# EAGLE board Main_board_revB (EAGLE 7.0.0)
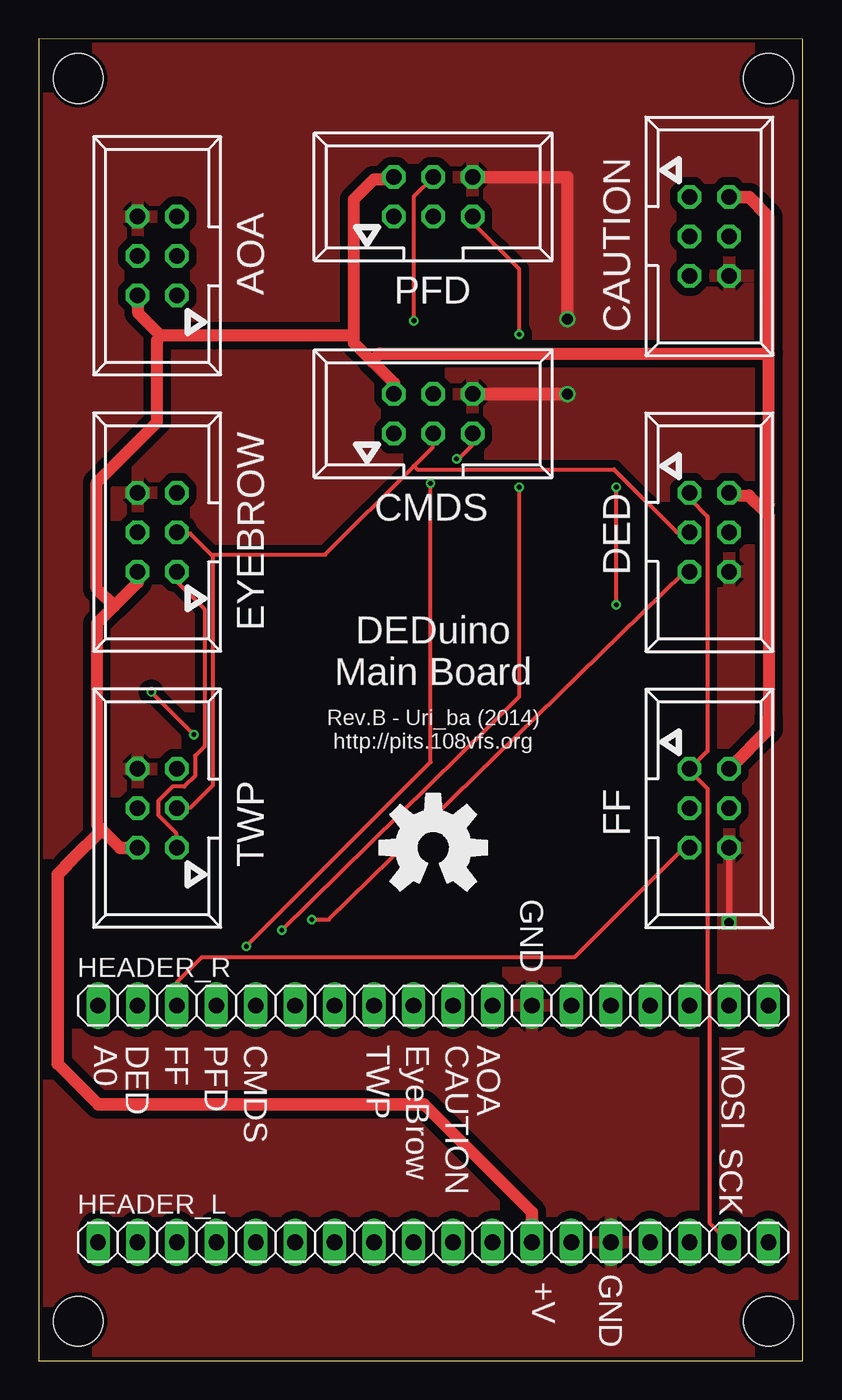
[diagram p0: board, top side]
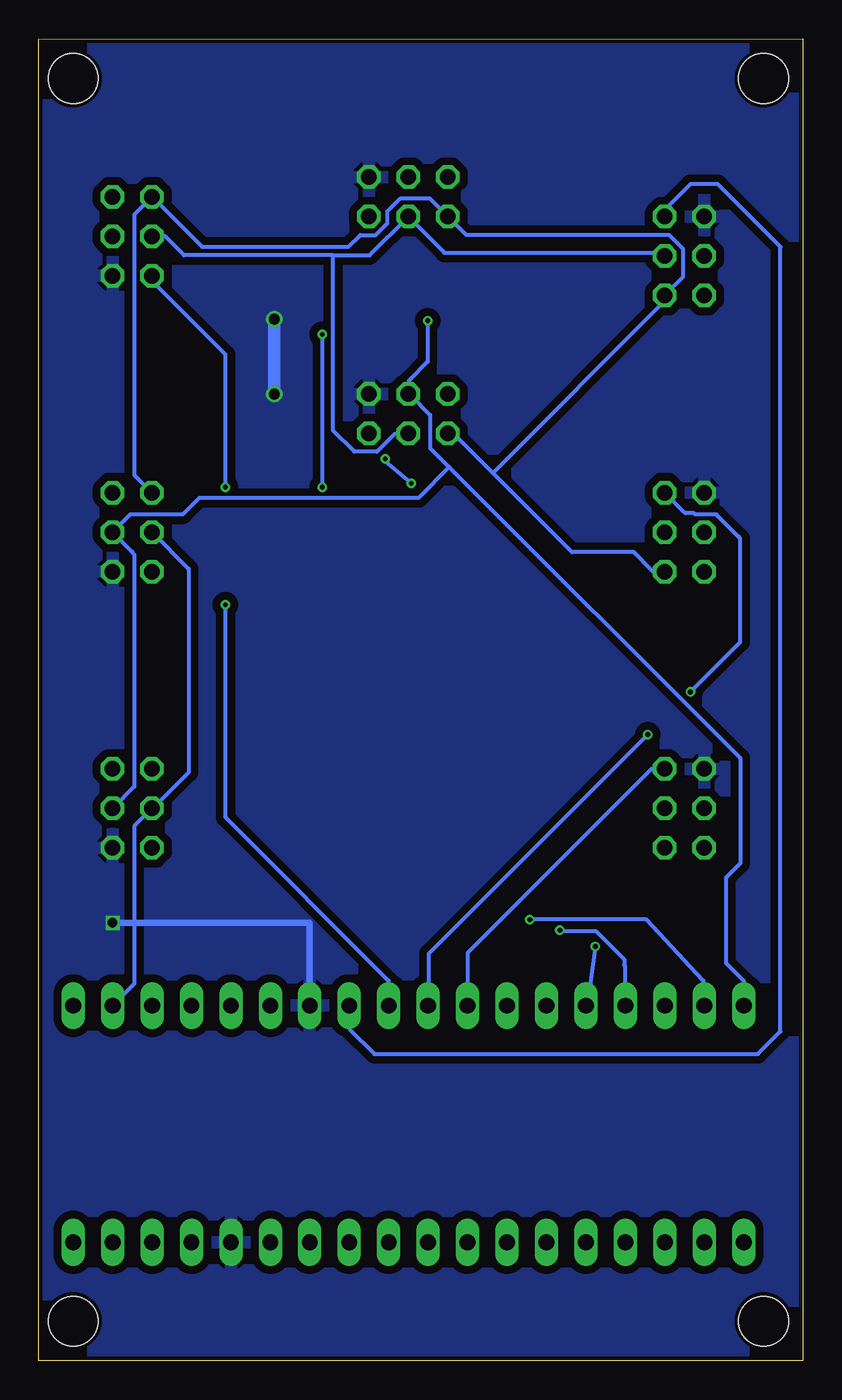
[diagram p1: board, bottom side, seen from below]

Size 49.2 x 85.1 mm. Coordinates in mm from the lower left corner, seen from the top.
Outline: 0,0 49.2,0 49.2,85.08 0,85.1 0,0
Copper layers (1*16): Top 0.035mm / dielectric 1.5mm / Bottom 0.035mm
Design rules "ITEADstudio_DRC": minimum track width 6mil, minimum drill 12mil, track to track 6mil, track to pad 6mil, pad to pad 6mil, via to via 6mil, smd to smd 0mil, copper to edge 10mil, drill to drill 10mil, minimum pad ring 10mil, minimum via ring 6mil, stop-mask expansion 2mil, vias tented up to drill 100mil, thermal gap 10mil
Net classes: 1 Power: width 0.762 mm, drill 0.508 mm, clearance 0.508 mm; 2 Normal: width 0.254 mm, drill 0.203 mm, clearance 0.254 mm
Holes 3.2 mm at 2.54,82.55 46.99,82.55 46.99,2.54 2.54,2.54

## Footprints (pad centres in the part's own frame; a part is rotated, then mirrored left to right if it is on the bottom)
057-006-1 = drill 1 octagon: 1 -2.54,-1.27; 2 -2.54,1.27; 3 0,-1.27; 4 0,1.27; 5 2.54,-1.27; 6 2.54,1.27
1X18 = drill 1.016 long: 1 -21.59,0; 2 -19.05,0; 3 -16.51,0; 4 -13.97,0; 5 -11.43,0; 6 -8.89,0; 7 -6.35,0; 8 -3.81,0; 9 -1.27,0; 10 1.27,0; 11 3.81,0; 12 6.35,0; 13 8.89,0; 14 11.43,0; 15 13.97,0; 16 16.51,0; 17 19.05,0; 18 21.59,0

## Placement (x,y rotation side)
AOA  057-006-1  [057-006-1]  7.62,71.12 90 top
CAUTION  057-006-1  [057-006-1]  43.18,72.39 270 top
CMDS  057-006-1  [057-006-1]  25.4,60.96 0 top
DED  057-006-1  [057-006-1]  43.18,53.34 270 top
EYEBROW  057-006-1  [057-006-1]  7.62,53.34 90 top
FF  057-006-1  [057-006-1]  43.18,35.56 270 top
HEADER_L  [1X18]  25.4,7.62 0 top
HEADER_R  [1X18]  25.4,22.86 0 top
LOGO1  OSHW-LOGOL  [OSHW-LOGO-L]  25.4,33.02 0 top
PFD  057-006-1  [057-006-1]  25.4,74.93 0 top
TWP  057-006-1  [057-006-1]  7.62,35.56 90 top

## Library data of the parts
AOA CAUTION CMDS DED EYEBROW FF PFD TWP = con-panduit; OC_FARNELL: unknown; OC_NEWARK: unknown
HEADER_L HEADER_R = pinhead
LOGO1 = SparkFun-Aesthetics

## Nets
+5V [Power]: AOA.2 CAUTION.2 CMDS.2 DED.2 EYEBROW.2 FF.2 HEADER_L.12 PFD.2 TWP.2
AOA_LATCH [Normal]: AOA.5 HEADER_R.11
CAUTION_LATCH [Normal]: CAUTION.5 HEADER_R.10
CMDS_SEL [Normal]: CMDS.5 HEADER_R.5
DED_SEL [Normal]: DED.5 HEADER_R.2
DISP_A0 [Normal]: CMDS.4 DED.4 FF.4 HEADER_R.1 PFD.4
EYEBROW_LATCH [Normal]: EYEBROW.5 HEADER_R.9
FF_SEL [Normal]: FF.5 HEADER_R.3
GND [Power]: AOA.6 CAUTION.6 CMDS.6 DED.6 EYEBROW.6 FF.6 HEADER_L.14 HEADER_R.12 PFD.6 TWP.6
MOSI [Normal]: AOA.3 CAUTION.3 CMDS.3 DED.3 EYEBROW.3 FF.3 HEADER_R.17 PFD.3 TWP.3
PFD_SEL [Normal]: HEADER_R.4 PFD.5
SCK [Normal]: AOA.1 CAUTION.1 CMDS.1 DED.1 EYEBROW.1 FF.1 HEADER_L.17 PFD.1 TWP.1
TWP_LATCH [Normal]: HEADER_R.8 TWP.5

## Tracks (layer width: path | path; a pad name or v marks a point on that pad's centre or on a via)
+5V
  Top 0.762: 47.02,41.38 47.02,54.41 46.67,54.75 | 46.67,54.75 45.72,55.7 45.03,55.7 44.88,55.85 44.5,55.85 DED.2 | 44.5,74.91 CAUTION.2 | 46.67,54.75 47.02,55.09 47.02,64.85 21.95,64.85 21.45,64.35 20.27,65.53 20.27,65.99 | 20.27,65.99 20.27,74.75 21.57,76.05 22.25,76.05 22.48,76.28 22.78,76.28 PFD.2 | 7.85,65.99 6.4,67.44 6.4,68.58 AOA.2 | 20.27,65.99 7.85,65.99 | 1.6,31.7 2.1,32.19 4.08,34.18 3.73,34.52 3.73,47.47 4.84,48.58 3.73,49.68 3.73,56.54 7.62,60.43 7.62,65.68 7.85,65.99
  Top 0.813: 2.1,32.19 1.22,31.32 1.22,19.1 3.81,16.51 24.79,16.51 31.75,9.55 HEADER_L.12 | 44.5,74.91 45.74,74.91 46.99,73.66 46.99,64.87 47.02,64.85 | 47.02,41.38 47.02,40.66 FF.2 | 4.84,48.58 6.35,50.09 EYEBROW.2 | 21.45,64.35 22.86,62.94 CMDS.2 | 4.08,34.18 5.23,33.02 TWP.2
AOA_LATCH
  Bottom 0.254: AOA.5 8.84,73.69 8.84,74.14 7.24,75.74 5.49,75.74 1.45,71.7 1.45,21.18 2.9,19.74 27.58,19.74 29.18,21.34 29.18,22.86 HEADER_R.11
CAUTION_LATCH  (via drill 0.3)
  Top 0.254: v37.19,48.67 v37.19,56.24
  Bottom 0.254: CAUTION.5 41.91,69.49 37.19,64.77 v37.19,56.24 | v37.19,48.67 37.19,34.98 26.67,24.46 HEADER_R.10
CMDS_SEL  (via drill 0.3)
  Top 0.254: v26.9,58.06 27.05,58.06 27.89,58.9 27.89,59.66 CMDS.5 | v25.22,56.49 25.22,38.53 v13.36,26.67
  Bottom 0.254: v26.9,58.06 26.9,57.91 v25.22,56.49 | 13.95,22.86 HEADER_R.5 13.87,22.96 v13.36,26.67
DED_SEL  (via drill 0.3)
  Top 0.254: v17.58,28.4 18.67,28.4 41.53,50.75 41.91,50.75 DED.5
  Bottom 0.254: v17.58,28.4 10.08,28.4 6.4,24.46 6.4,22.86 HEADER_R.2
DISP_A0  (via drill 0.3)
  Top 0.254: v24.16,66.95 24.16,74.95 PFD.4
  Bottom 0.254: v24.16,66.95 24.16,64.31 25.38,63.09 25.38,62.26 CMDS.4 25.3,62.18 24,60.88 24,58.75 22.78,57.53 | HEADER_R.1 3.81,24.46 4.95,25.6 4.95,31.09 4.04,32 4.04,38.79 22.78,57.53 | 22.78,57.53 24.77,55.55 38.86,55.55 39.93,54.48 43.31,54.48 DED.4 43.18,52.07 43.13,51.97 43.05,51.89 43.05,36.96 FF.4
EYEBROW_LATCH  (via drill 0.3)
  Top 0.254: v9.98,40.31 v7.24,43.05
  Bottom 0.254: v7.24,43.05 4.04,46.25 4.04,52.93 4.12,53.03 5.56,54.48 6.93,54.48 7.01,54.56 7.54,54.56 7.62,54.61 EYEBROW.5 | v9.98,40.31 24.08,26.21 24.08,22.86 HEADER_R.9
FF_SEL
  Top 0.254: FF.5 41.91,32.99 41.53,32.99 34.52,25.98 10.52,25.98 8.89,24.36 HEADER_R.3 8.91,22.86
GND  (via drill 0.6, 0.7)
  Top 0.406: FF.6 v44.45,28.19
  Top 0.813: PFD.6 34.04,76.2 v34.04,67.06 | CMDS.6 v34.04,62.23
  Bottom 0.406: v44.45,28.19 31.75,28.19 HEADER_R.12
  Bottom 0.813: v34.04,67.06 v34.04,62.23
  pour Bottom: -0.51,85.6 49.53,85.6 49.53,-0.13 -0.25,-0.25
  pour Top: -0.89,85.98 49.66,86.23 50.16,-0.89 -0.76,-0.76
MOSI
  Top 0.254: 11.2,51.82 11.2,37.03 9.75,35.59 8.91,35.59 TWP.3 | 11.2,51.82 9.75,53.26 8.99,53.26 8.91,53.34 EYEBROW.3 | 24.16,57.61 18.44,51.89 11.28,51.89 11.2,51.82 | 24.16,57.61 25.38,58.83 25.38,59.66 CMDS.3 | DED.3 41.07,53.34 37.03,57.38 24.38,57.38 24.16,57.61
  Bottom 0.254: CAUTION.3 41.07,72.39 39.85,71.17 30.25,71.17 | 44.42,22.86 HEADER_R.17 43.05,24.26 43.05,34.42 FF.3 41.83,35.59 39.55,37.87 39.55,50.98 DED.3 | 30.25,71.17 30.25,59.89 28.88,58.52 27.43,58.52 26.29,59.66 25.45,59.66 CMDS.3 | AOA.3 9.09,71.32 23.09,71.32 25.38,73.61 PFD.3 27.89,71.17 30.25,71.17
PFD_SEL  (via drill 0.3)
  Top 0.254: v30.94,66.06 30.94,70.26 27.96,73.23 27.96,73.61 PFD.5 | v30.94,56.24 30.94,42.75 v15.65,27.71
  Bottom 0.254: v30.94,56.24 v30.94,66.06 | HEADER_R.4 11.43,25.4 11.51,25.45 11.51,25.83 13.34,27.66 15.62,27.66 v15.65,27.71
SCK
  Top 0.254: TWP.1 8.84,33.07 8.84,33.98 7.7,35.13 7.7,36.04 8.61,36.96 9.37,36.96 10.06,37.64 10.06,38.94 10.67,39.55 10.67,48.39 8.91,50.14 8.91,50.75 EYEBROW.1 | DED.1 41.91,55.5 43.05,54.36 43.05,39.24 FF.1 41.91,37.97 43.05,36.83 43.05,23.88 43.18,23.75 43.18,8.89 HEADER_L.17
  Bottom 0.254: 19.96,57.15 14.86,52.05 10.9,52.05 9.68,50.83 8.91,50.83 EYEBROW.1 | 19.96,57.15 22.48,59.66 22.86,59.66 CMDS.1 | 19.96,57.15 8.91,68.2 8.91,68.58 AOA.1 8.84,68.66 7.7,69.8 7.7,71.55 8.61,72.47 21.67,72.47 PFD.1 24.03,74.83 25.91,74.83 26.75,73.99 26.75,73.23 27.51,72.47 28.5,72.47 29.26,71.7 38.68,71.7 CAUTION.1 | 41.83,74.91 CAUTION.1 | CAUTION.1 43.05,73.79 43.05,57.02 DED.1
TWP_LATCH
  Bottom 0.254: TWP.5 9.75,38.1 21.57,26.29 21.57,22.86 HEADER_R.8

## Text on the board
tNames: DEDuino / Main Board | Rev.B - Uri_ba (2014) / http://pits.108vfs.org | GND | A0 | DED | FF | PFD | CMDS | TWP | EyeBrow | CAUTION | AOA | MOSI | SCK | GND | +V